# Altium PCB ElectroSmithES2164.PcbDoc
Units mil, origin at the board's own origin, x right, y up, seen from the top; angles counter-clockwise.
Board outline 2000 x 3200 mil, 2 copper layers (Top Layer, Bottom Layer); 21 components, 18 nets, 74 pads, 1 vias.
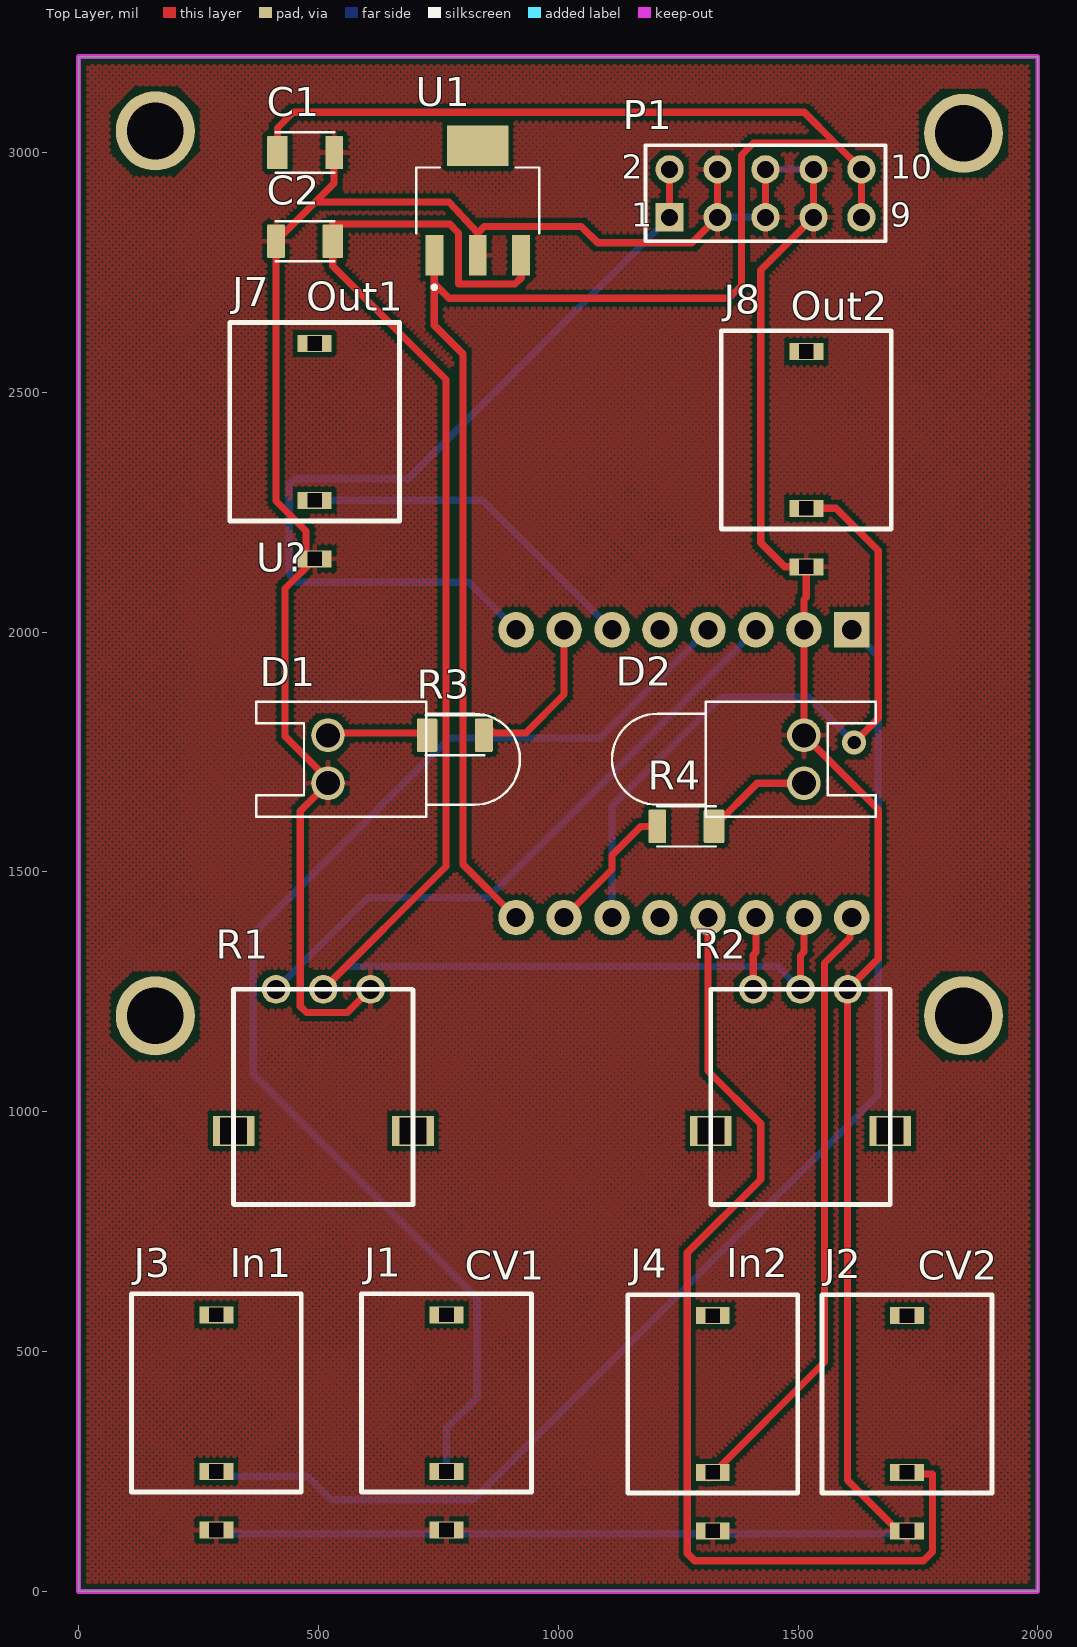
[diagram p0: Top Layer view]
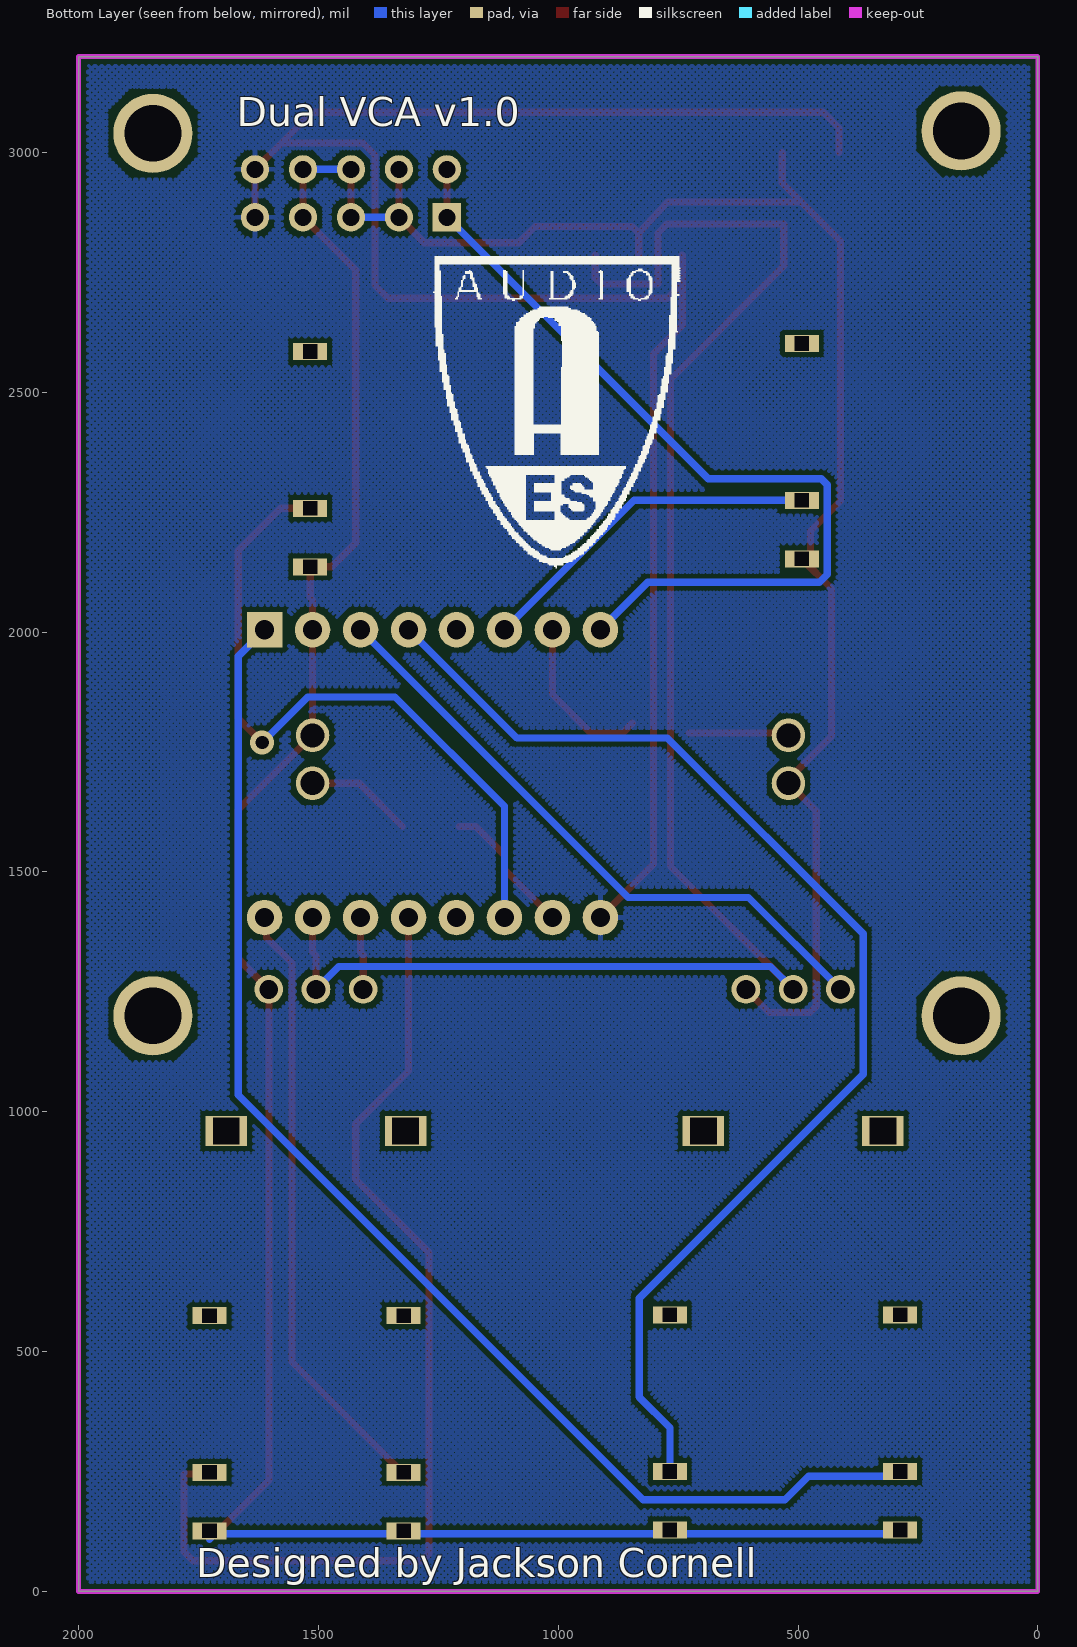
[diagram p1: Bottom Layer view, seen from below]

## Layer stack, top to bottom
Top Solder: solder mask 0.4, Solder Resist, Dk 3.5
Top Layer: signal copper 1.4
Dielectric 1: dielectric 12.6, FR-4, Dk 4.8
Bottom Layer: signal copper 1.4
Bottom Solder: solder mask 0.4, Solder Resist, Dk 3.5

## Board outline
0,0 0,3200 2000,3200 2000,0

## Design rules (kind name [scope] priority, off if disabled: settings)
Clearance [All] p1: gap=10 ignorepadtopadclearanceinfootprint=FALSE except(0: Arc-Hole Track-Hole SMDPad-Hole THPad-Hole Via-Hole Fill-Hole Poly-Hole Region-Hole Text-Hole)
ComponentClearance [All] p1 off: gap=10 collisioncheckmode=3 verticalgap=10 showdistances=FALSE
PolygonConnect [All] p1: connectstyle=Relief reliefconductorwidth=10 reliefentries=4 polygonreliefangle="90 Angle" airgapwidth=10
RoutingVias [All] p1: holewidth=28 width=50 viastyle="Through Hole" minholewidth=28 minwidth=50 maxholewidth=28 maxwidth=50
SolderMaskExpansion [All] p1: expansion=4
Width [All] p1: maxlimit=20 minlimit=15 preferedwidth=15 minimp=50.000000 maximp=50.000000 favimp=50.000000
29 further rules are at their usual default settings.

## Classes and differential pairs
component class ElectroSmithES2164: C1 C2 D1 D2 J1 J2 J3 J4 J7 J8 P1 R1 R2 R3 R4 U1 U?

## Components (designator, comment, footprint, x,y, rotation, side; value= is the part's Value field where it differs from the comment)
C1 "Cap" RESC3115X65N 472.17,3000 r0 top value=0.47uF
C2 "Cap" RESC3115X65N 472.17,2815 r180 top value=22uF
D1 "LED0" LED-0 520,1735 r90 top
D2 "LED0" LED-0 1512.17,1735 r270 top
J1 "MJ-3523-SMT" "ES 3.5mm Jack" 767.17,127.95 r0 top
J2 "MJ-3523-SMT" "ES 3.5mm Jack" 1727.17,126.18 r0 top
J3 "MJ-3523-SMT" "ES 3.5mm Jack" 287.17,127.95 r0 top
J4 "MJ-3523-SMT" "ES 3.5mm Jack" 1322.17,126.18 r0 top
J7 "MJ-3523-SMT" "ES 3.5mm Jack" 492.17,2152.95 r0 top
J8 "MJ-3523-SMT" "ES 3.5mm Jack" 1517.17,2136.18 r0 top
P1 "Header 5X2" HDR2X5 1232.17,2865 r0 top
R1 "RPot" "ES Potentiometer" 608.58,1255.28 r180 top value=10K
R2 "RPot" "ES Potentiometer" 1603.58,1255.28 r180 top value=10K
R3 "Res1" RESC3115X65N 784.37,1785 r0 top value=100
R4 "Res1" RESC3115X65N 1267.17,1595 r180 top value=100
U1 "LM2940IMP-10.0" SOT230P700X180-4N 832.17,2900 r90 top
U? "Designed for ES_2164_Rev4" ES_2164_V2 1667.09,2059.92 r180 top
? "Comment" "Hole 3mm" 160,3045 r270 top
? "Comment" "Hole 3mm" 1845,3040 r270 top
? "Comment" "Hole 3mm" 1845,1200 r270 top
? "Comment" "Hole 3mm" 160,1200 r270 top

## Footprints (in the part's own frame and the unit in brackets; to place one, negate y for a bottom-side part, rotate by r counter-clockwise, add the part's x,y. Pads: shape width x height; smd on the part's side, far side on the other; paste and mask are expansions set on the pad)
"ES 3.5mm Jack" [mm]
  rect 1.8x0.9 hole 0.75 square: 1(0,0) 2(0,3.1) 3(0,11.4)
  silkscreen extent -4.5,2.01 4.5,12.51
"ES Potentiometer" [mm]
  round 1.524 hole 1: 1(0,0) 2(2.5,0) 3(5,0)
  rect 2.2x1.6 hole 1.4 square: MH1(-2.25,7.5) MH2(7.25,7.5)
  silkscreen extent -2.25,0 7.25,11.39
ES_2164_V2 [mil]
  rect 74x74 / inner rect 60x60 / far side rect 74x74 hole 40: 1(54.92,54.92)
  round 74 / inner round 60 / far side round 74 hole 40: 2(154.92,54.92) 3(254.92,54.92) 4(354.92,54.92) 5(454.92,54.92) 6(554.92,54.92) 7(654.92,54.92) 8(754.92,54.92) 9(754.92,654.92) 10(654.92,654.92) 11(554.92,654.92) 12(454.92,654.92) 13(354.92,654.92) 14(254.92,654.92) 15(154.92,654.92) 16(54.92,654.92)
HDR2X5 [mm] "Connector; Header; 5x2 Position"
  rect 1.5x1.5 hole 0.9: 1(0,0)
  round 1.5 hole 0.9: 2(0,2.54) 3(2.54,0) 4(2.54,2.54) 5(5.08,0) 6(5.08,2.54) 7(7.62,0) 8(7.62,2.54) 9(10.16,0) 10(10.16,2.54)
  silkscreen extent -1.27,-1.27 11.43,3.81
"Hole 3mm" [mil]
  round 165 hole 118.11: 1(0,0)
LED-0 [mil] "LED; 2 Leads"
  round 70 hole 50: 1(50,0) 2(-50,0)
  silkscreen extent -120,-400 120,150
RESC3115X65N [mm]
  rrect14% 1.09x1.77 smd: 1(-1.465,0)
  rrect14% 0.94x1.77 smd: 2(1.54,0)
  silkscreen extent -1.55,-1.07 1.55,1.07
SOT230P700X180-4N [mm]
  rect 2.15x0.95 smd: 1(-2.9,2.3) 2(-2.9,0) 3(-2.9,-2.3)
  rect 2.15x3.25 smd: 4(2.9,0)
  silkscreen extent -4.7,-3.25 1.75,3.25, body extent -3.25,-3.5 3.25,3.5, height 1.8

## Part data
C1 C2: "Capacitor", LatestRevisionDate=17-Jul-2002, LatestRevisionNote="Re-released for DXP Platform.", PackageDescription="Radial Cap, Thru-Hole; 2 Leads; 0.3 in Pin Spacing", PackageReference=RAD-0.3, Published=8-Jun-2000, Publisher="Altium Limited"
D1 D2: "Typical INFRARED GaAs LED", LatestRevisionDate=08-Jul-2005, LatestRevisionNote="Mech Layer 1 removed.", PackageDescription="LED; 2 Leads", PackageReference=LED-0, Published=8-Jun-2000, Publisher="Altium Limited"
J1 J2 J3 J4 J7 J8: "3.5 mm, Mono, Right Angle, Surface Mount _SMT_, Audio Jack Connector", Package=None, Availability=Unavailable, CUI_purchase_URL=https://www.cuidevices.com/product/interconnect/connectors/audio-connectors/jacks/mj-3523-smt?utm_source=snapeda.com&utm_medium=referral&utm_campaign=snapedaBOM, MF="CUI Devices", MP=MJ-3523-SMT-TR, Price=None, SnapEDA_Link=https://www.snapeda.com/parts/MJ-3523-SMT-TR/CUI%20Devices/view-part/522855/?ref=snap
P1: "Header, 5-Pin, Dual row", LatestRevisionDate=17-Jul-2002, LatestRevisionNote="Re-released for DXP Platform.", Publisher="Altium Limited"
R1 R2: "Potentiometer", LatestRevisionDate=17-Jul-2002, LatestRevisionNote="Re-released for DXP Platform.", PackageDescription="Variable Resistor, Thru-Hole; 3 Leads", PackageReference=VR5, Published=8-Jun-2000, Publisher="Altium Limited", Set Position=0.5, Sim Note="Enter the Resistance value and the set point into parameter fields."
R3 R4: "Resistor", LatestRevisionDate=17-Jul-2002, LatestRevisionNote="Re-released for DXP Platform.", PackageDescription="Axial Device, Thru-Hole; 2 Leads; 0.3 in Pin Spacing", PackageReference=AXIAL-0.3, Published=8-Jun-2000, Publisher="Altium Limited"
U1: library part LM2940T-5.0, "1-A, 26-V, high-PSRR, low-dropout voltage regulator 3-TO-220 -40 to 125", Package="TO-220-3 Texas Instruments", Availability=Warning, DigiKey-Purchase-URL=https://snapeda.com/shop?store=DigiKey&id=533322, MF="Texas Instruments", Mouser-Purchase-URL=https://snapeda.com/shop?store=Mouser&id=533322, MP=LM2940T-5.0, Price=None, SnapEDA_Link=https://www.snapeda.com/parts/LM2940T-5.0/Texas%20Instruments/view-part/533322/?ref=snap
U?: library part ES_2164_V2, DeviceSetName=ES_2164_V2, GateName_1=G$1, LibraryName=Electrosmith_Boards, Package=ES_2164_V2, SymbolName_1=ES_2164_V2

## Via types
v1: diameter 50, hole 28, Top Layer to Bottom Layer, 1 vias

## Nets (pads, with @x,y where several pads share a name; then routed paths per layer and width w, separated by ;. In a path a pad name is that pad's centre, name@x,y a point inside that pad or via, vN(x,y) a via of type N, cw(c..) or ccw(c..) an arc to the next point about the centre after c; other vN are vias at no path point)
+10V: C2.1 R1.2 R2.2 U1.3 U?.15 | length 3545.8
  Top Layer w15: R1.2 766.17,1511.28 766.17,2527 529.84,2763.32 C2.1 529.84,2851 773.67,2851 792.17,2832.5 792.17,2726 909.67,2726 922.72,2739.05 U1.3 ; R2.2 1505.16,1326 1512.17,1333.01 U?.15
  Bottom Layer w15: R1.2 557.66,1302.78 1457.66,1302.78 R2.2
CV1: J1.2 U?.4 | length 2551.6
  Bottom Layer w15: J1.2 767.17,341 831.17,405 831.17,611 364.17,1078 364.17,1371 772.17,1779 1086.17,1779 U?.4
CV2: J2.2 U?.13 | length 2175
  Top Layer w15: U?.13 1312.17,1085 1422.17,975 1422.17,859 1269.17,706 1269.17,79.5 1284.67,64 1761.67,64 1780.17,82.5 1780.17,245 J2.2@1727.17,245
GND: C1.2 C2.2 D1.2 D2.2 J1.1 J2.1 J3.1 J4.1 J7.1 J8.1 P1.3 P1.4 P1.5 P1.6 P1.7 P1.8 R1.1 R2.1 U1.2 U?.2 | length 8038
  Top Layer w15: C1.2 532.8,2936.26 493.54,2897 ; R1.1 560.31,1207 475.17,1207 462.17,1220 462.17,1627.17 D1.2 520,1693.17 430.17,1783 430.17,2090.95 J7.1 474.17,2152.95 474.17,2211 411.54,2273.63 C2.2 493.54,2897 ; U1.2 832.17,2832.5 ; P1.4 P1.3 1279.17,2812 1082.17,2812 1048.17,2846 845.67,2846 832.17,2832.5 ; P1.5 P1.6 ; P1.8 P1.7 1422.17,2755 1422.17,2186.18 1472.17,2136.18 J8.1 1517.17,2073 1512.17,2068 U?.2 D2.2 1667.17,1630 1667.17,1318.86 R2.1 1603.17,1255.28 1603.17,231.95 1708.94,126.18 J2.1 ; 493.54,2897 772.17,2897 832.17,2832.5
  Bottom Layer w15: J3.1@287.17,120 1715.12,120 1727.17,107.95 ; P1.3 P1.5 ; P1.6 P1.8
IN1: J3.2 U?.1 | length 2742.7
  Bottom Layer w15: J3.2@287.17,240 478.17,240 527.17,191 823.17,191 1667.17,1035 1667.17,1950 U?.1
IN2: J4.2 U?.16 | length 1294.3
  Top Layer w15: J4.2@1313.78,236.61 1555.17,478 1555.17,1310 1608.17,1363 1608.17,1405 U?.16
LED1: R3.2 U?.7 | length 343.1
  Top Layer w15: R3.2@845.47,1810 865.47,1790 932.17,1790 1012.17,1870 U?.7
LED2: R4.2 U?.10 | length 290.6
  Top Layer w15: U?.10 1112.17,1505 1112.17,1535 1172.17,1595 R4.2
NetD1_1: D1.1 R3.1 | length 207.2
  Top Layer w15: D1.1@520,1790 R3.1@727.17,1790
NetD2_1: D2.1 R4.1 | length 224.6
  Top Layer w15: R4.1 1414.84,1685 D2.1
NODE1: U?.5
NODE2: U?.12
OUT1: J7.2 U?.6 | length 731.8
  Bottom Layer w15: J7.2 842.17,2275 U?.6
OUT2: J8.2 U?.11 | length 1478
  Top Layer w15: J8.2 1578.94,2258.23 1667.17,2170 1667.17,1820 v1(1617.17,1770)
  Bottom Layer w15: U?.11 1112.17,1637 1340.17,1865 1522.17,1865 v1(1617.17,1770)
POT1: R1.3 U?.3 | length 1311
  Bottom Layer w15: R1.3 603.46,1447 854.17,1447 U?.3
POT2: R2.3 U?.14 | length 152
  Top Layer w15: R2.3 1406.73,1327 1412.17,1332.43 U?.14
Vcc: C1.1 P1.9 P1.10 U1.1 U?.9 | length 4025
  Top Layer w15: C1.1 414.49,3051.32 447.17,3084 1513.17,3084 1577.17,3020 ; U1.1 741.61,2726.55 ; U?.9 801.17,1516 801.17,2580.45 741.61,2640 741.61,2726.55 ; P1.9 P1.10 1577.17,3020 ; 741.61,2726.55 772.17,2696 1355.17,2696 1382.17,2723 1382.17,2995 1407.17,3020 1577.17,3020
Vee: P1.1 P1.2 U?.8 | length 1832.1
  Top Layer w15: P1.1 P1.2
  Bottom Layer w15: U?.8 813.17,2104 455.17,2104 439.17,2120 439.17,2307.5 451.67,2320 687.17,2320 P1.1
pads on no net: ?.1 J1.3 J2.3 J3.3 J4.3 J7.3 J8.3 R1.MH1 R1.MH2 R2.MH1 R2.MH2 U1.4

## Polygon pours and split planes (outlines as drawn)
GND on Top Layer (hatched 45Degree grid 10 track 8, pour order 0): 0,3200 2000,3200 2000,0 0,0
Vcc on Bottom Layer (hatched 45Degree grid 10 track 8, pour order 2): 0,3200 2000,3200 2000,0 0,0

## Keep-outs
Keep-Out Layer:
  the board outline again, w10

## Silkscreen, mask and mechanical layers (free items; w line width, h text height)
Top Overlay:
  text "Out1" at 475,2670 h60
  text "Out2" at 1485,2650 h60
  text "In1" at 315,655 h60
  text "In2" at 1350,655 h60
  text "CV1" at 805,650 h60
  text "CV2" at 1750,650 h60
Bottom Overlay:
  drawing of 15 lines, arcs and shapes, not listed
  text "Dual VCA v1.0" at 1670,3055 h60
  text "Designed by Jackson Cornell" at 1755,29.99 h60

## Text inside footprints (layer, text, board x,y; h text height)
P1: Top Overlay "10" at 1692.17,2945 h50; Top Overlay "9" at 1692.17,2845 h50; Top Overlay "1" at 1152.17,2845 h50; Top Overlay "2" at 1132.17,2945 h50